# Altium PCB MicroPlayerPCB.PcbDoc
Units mm, origin at the board's own origin, x right, y up, seen from the top; angles counter-clockwise.
Board outline 30 x 30 mm, 4 copper layers (Top Layer, Ground, Power, Bottom Layer), stack 1.282 mm thick; 84 components, 68 nets, 328 pads, 105 vias.
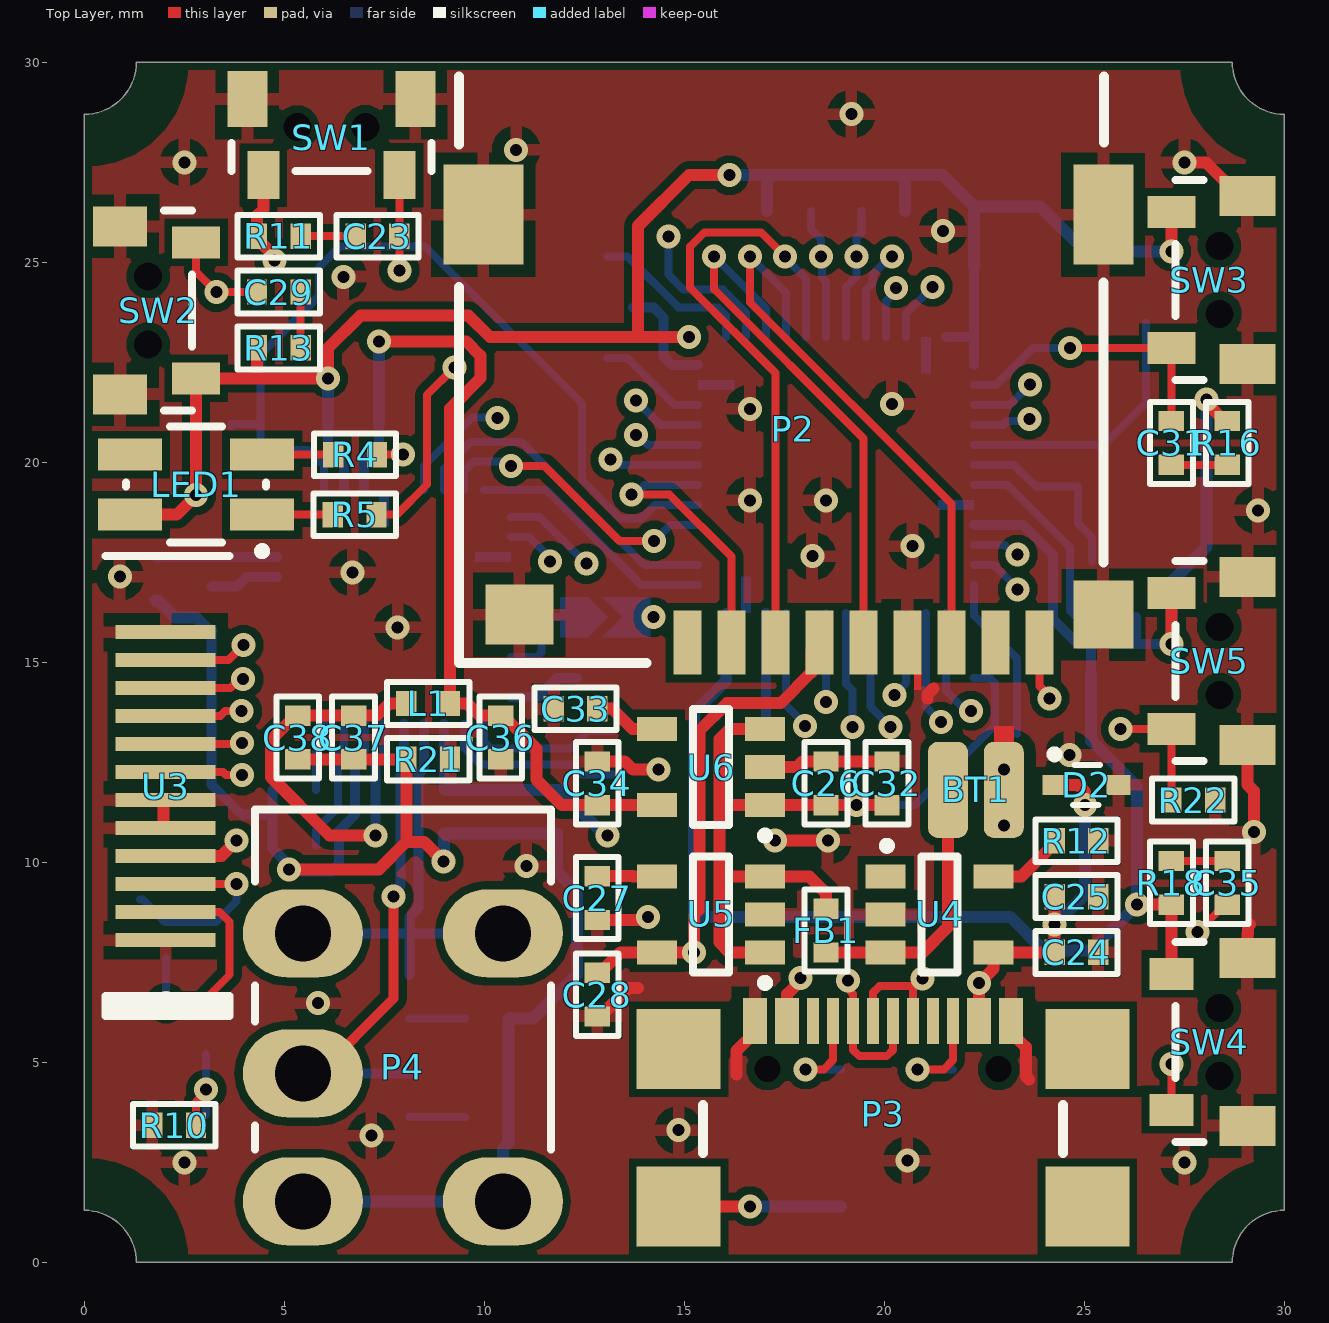
[diagram p0: Top Layer view]
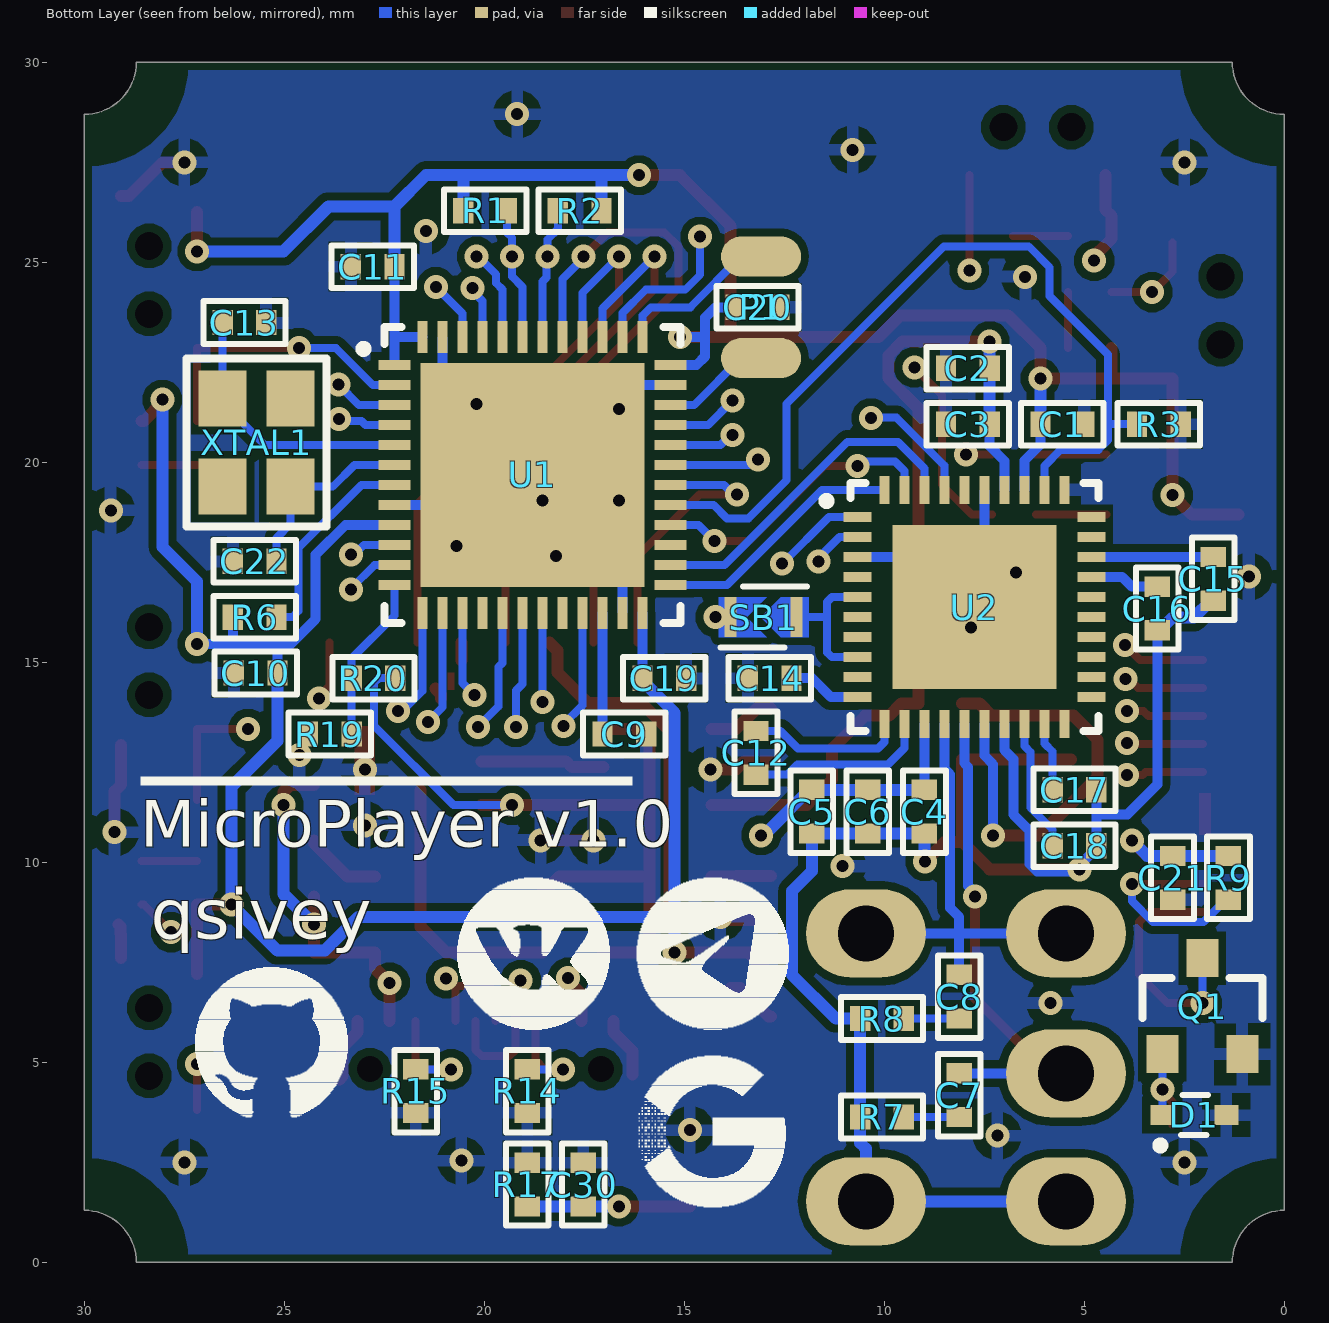
[diagram p1: Bottom Layer view, seen from below]
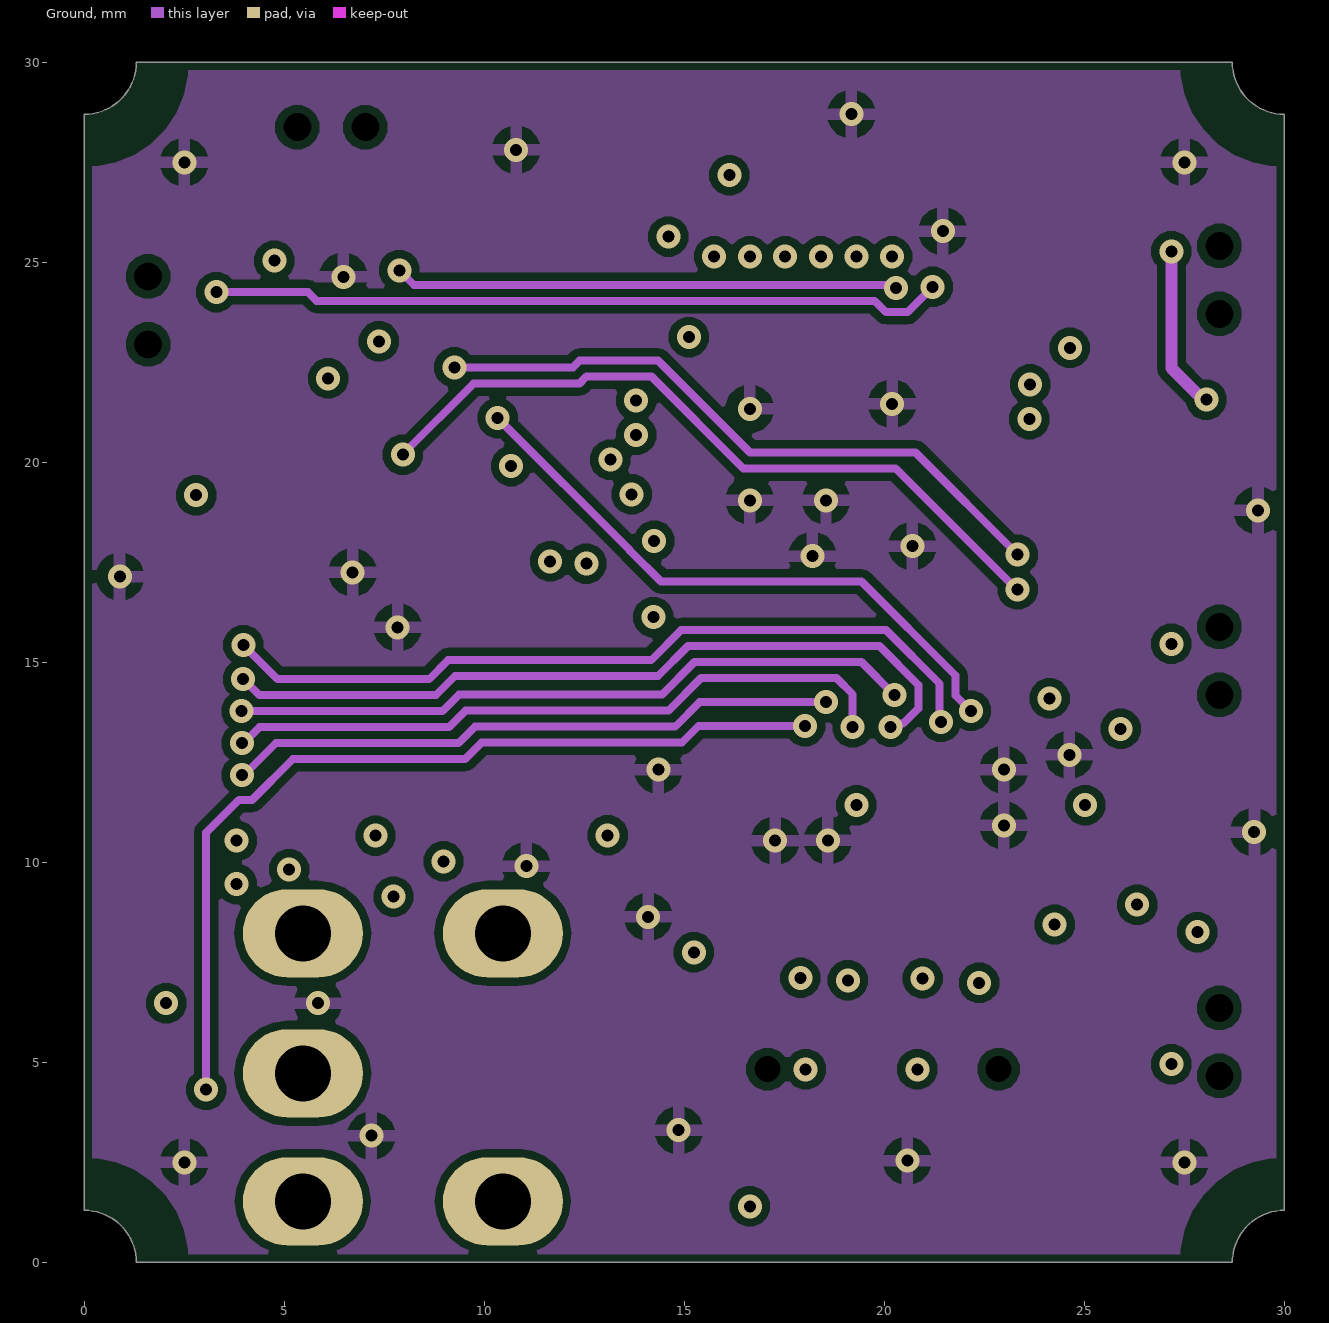
[diagram p2: Ground]
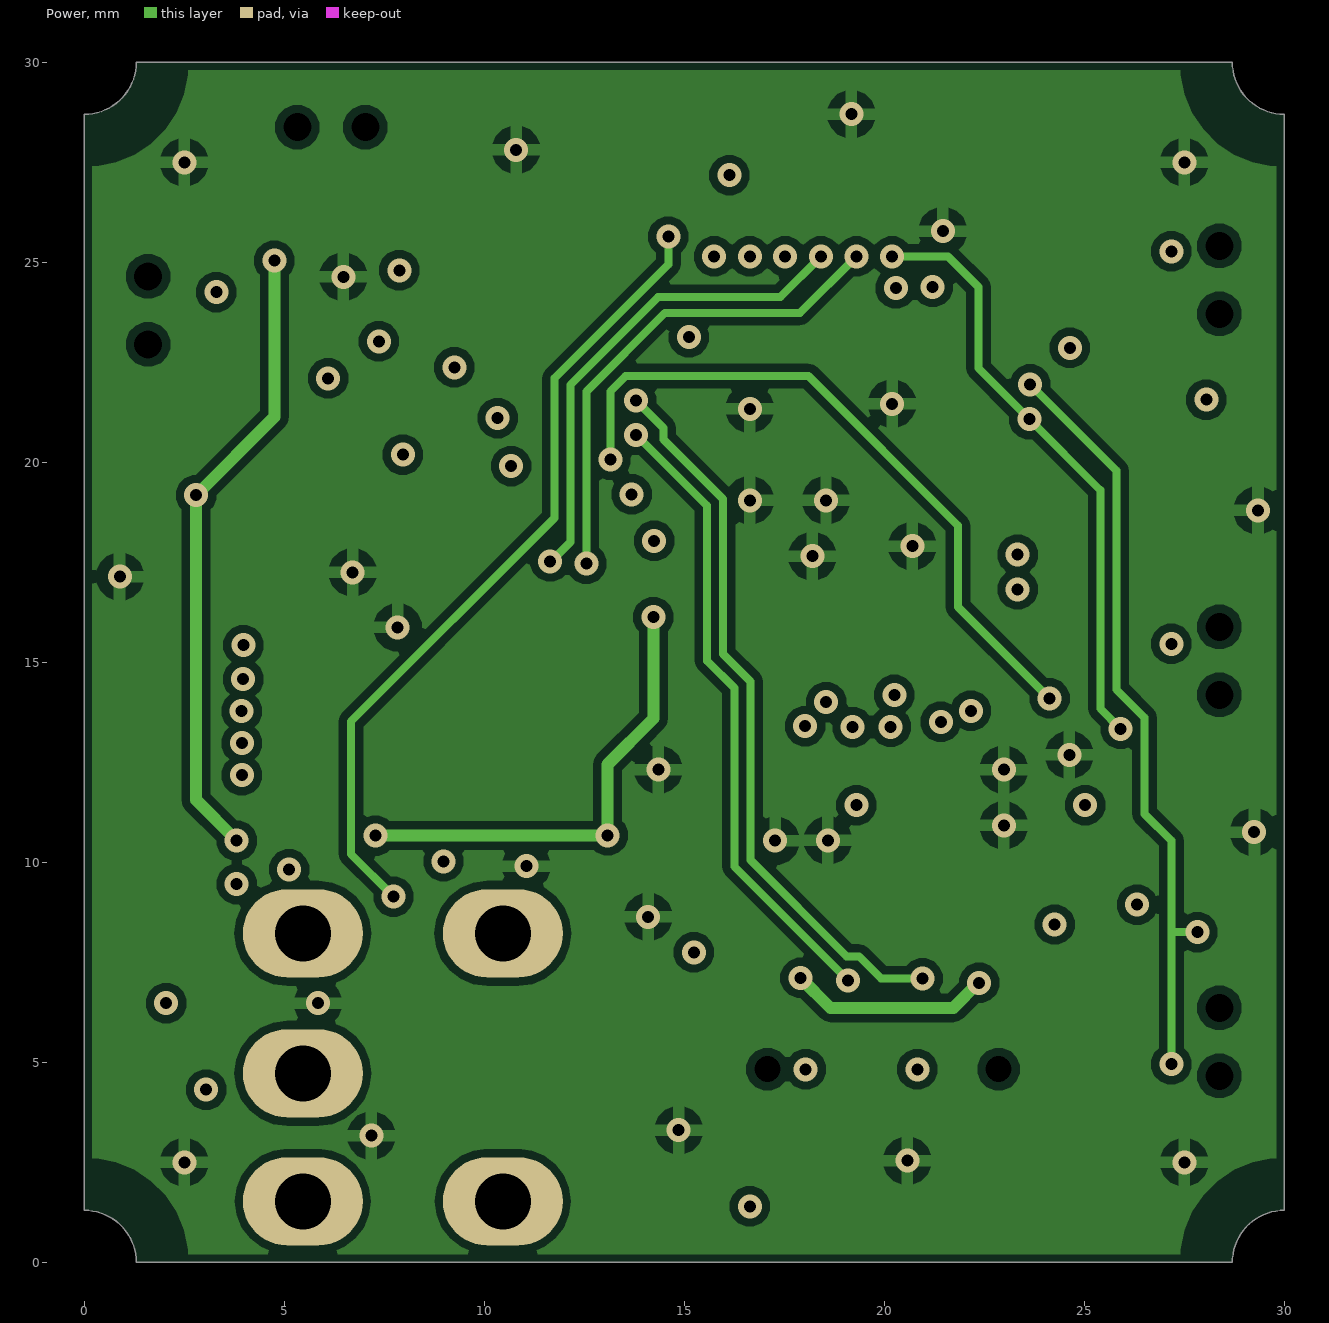
[diagram p3: Power]
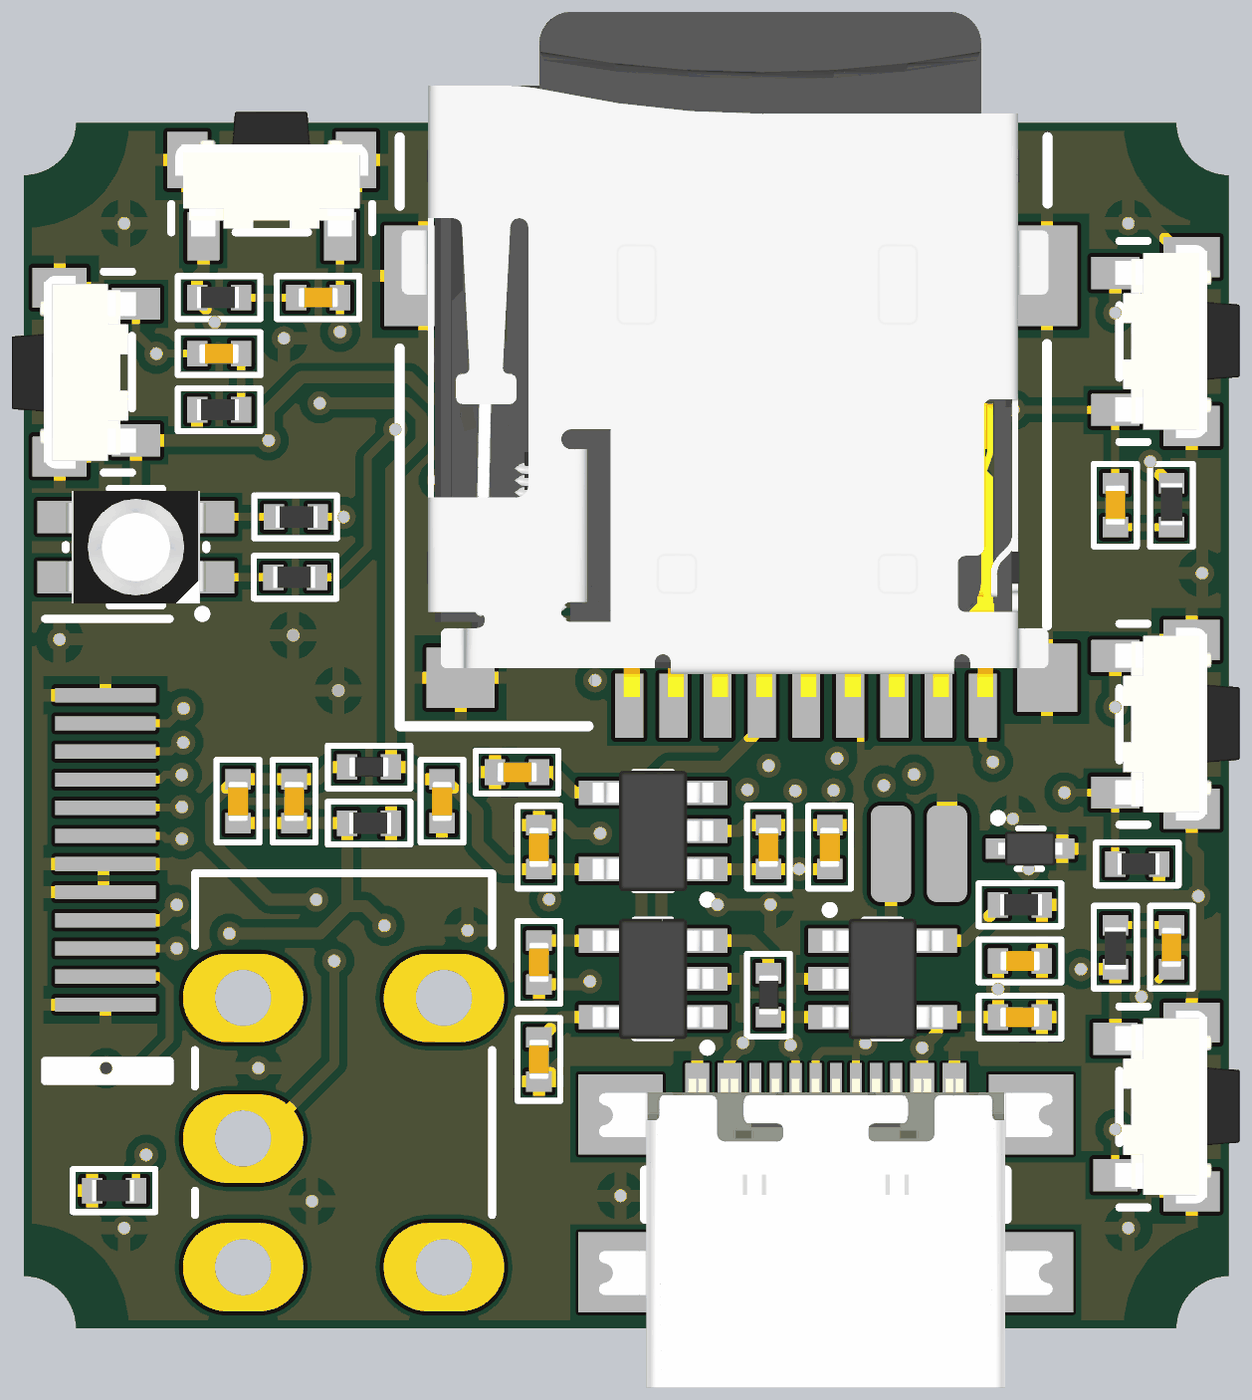
[diagram p4: 3D render of the assembled board from above, using the file's embedded part models]
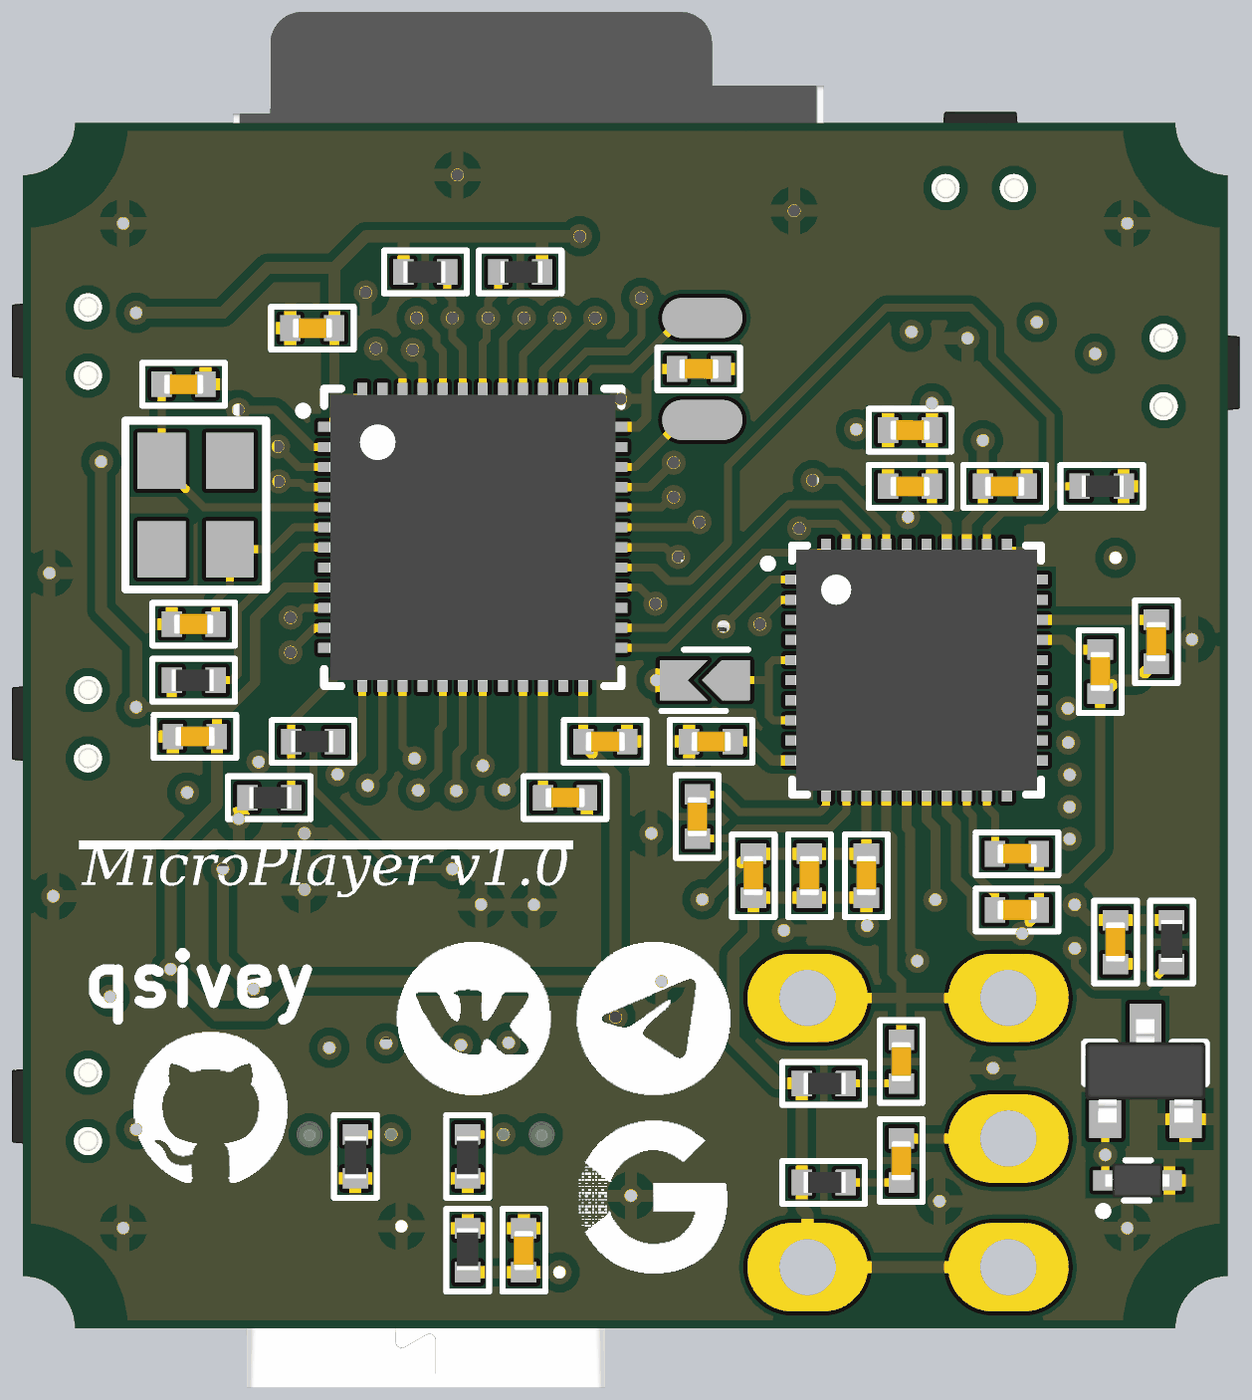
[diagram p5: 3D render of the assembled board from below, using the file's embedded part models]

## Layer stack, top to bottom
Top Solder: solder mask 0.01, Solder Resist, Dk 3.5
Top Layer: signal copper 0.035
Dielectric 2: prepreg 0.0711, PP-006, Dk 4.1
Ground: signal copper 0.035
Dielectric 1: dielectric 1, FR-4, Dk 4.8
Power: signal copper 0.035
Dielectric 3: prepreg 0.0711, PP-006, Dk 4.1
Bottom Layer: signal copper 0.035
Bottom Solder: solder mask 0.01, Solder Resist, Dk 3.5

## Board outline
0,1.3 0,28.7 ccw(c0,30) 1.3,30 28.7,30 ccw(c30,30) 30,28.7 30,1.3 ccw(c30,0) 28.7,0 1.3,0 ccw(c0,0)

## Design rules (kind name [scope] priority, off if disabled: settings)
AssemblyTestPointUsage [All] p1 off:
AssemblyTestpoint [All] p1 off: testpointundercomponent=TRUE minsize=1.016 maxsize=2.54 preferedsize=1.524 minholesize=0 maxholesize=1.016 preferedholesize=0.813 testpointgrid=0.025 usegrid=TRUE gridtolerance=0 allowsidetop=TRUE allowsidebottom=TRUE
BoardOutlineClearance [All] p1: gap=0.2 ignorepadtopadclearanceinfootprint=FALSE
Clearance [All] p1: gap=0.2 ignorepadtopadclearanceinfootprint=FALSE
ComponentClearance [All] p1 off: gap=0 collisioncheckmode=3 verticalgap=0 showdistances=FALSE
DiffPairsRouting [All] p1 off: maxlimit=0.254 minlimit=0.254 mostfreqgap=0.254 toplayer_minwidth=0.381 toplayer_maxwidth=0.381 toplayer_prefwidth=0.381 midlayer1_minwidth=0.381 midlayer1_maxwidth=0.381 midlayer1_prefwidth=0.381 midlayer2_minwidth=0.381 midlayer2_maxwidth=0.381 midlayer2_prefwidth=0.381 bottomlayer_minwidth=0.381 bottomlayer_maxwidth=0.381 bottomlayer_prefwidth=0.381 maxuncoupledlength=12.7
FabricationTestPointUsage [All] p1 off: valid=0 allowmultiple=FALSE
FabricationTestpoint [All] p1 off: side=3 testpointundercomponent=TRUE minsize=1.016 maxsize=2.54 preferedsize=1.524 minholesize=0 maxholesize=1.016 preferedholesize=0.813 testpointgrid=0.025 allowsidetop=TRUE allowsidebottom=TRUE usegrid=TRUE gridtolerance=0
FanoutControl Fanout_BGA [IsBGA] p1 off: bgadir=Out bgaviamode=Centered fanoutstyle=Auto fanoutdirection=Alternating viagrid=0.025 // Fanout_BGA (Default Rule)
Height [All] p1: minheight=0 maxheight=100 prefheight=0.5
HoleSize [All] p1: absolutevalues=TRUE maxlimit=100 minlimit=0.3 maxpercent=80.000 minpercent=20.000
HoleToHoleClearance [All] p1: gap=0.2 allowstackedmicrovias=TRUE
MinimumAnnularRing [All] p1: minimumring=0.1
MinimumSolderMaskSliver [All] p1: minsoldermaskwidth=0
PlaneClearance [All] p1: clearance=0.3
PlaneConnect [All] p1: planeconnectstyle=Relief reliefexpansion=0.5 reliefentries=4 reliefconductorwidth=0.3 reliefairgap=0.3
PolygonConnect [All] p1: connectstyle=Relief reliefconductorwidth=0.3 reliefentries=4 polygonreliefangle="90 Angle" airgapwidth=0.3
RoutingCorners [All] p1: cornerstyle=45-Degree minsetback=0.635 maxsetback=0.635
RoutingVias [All] p1: holewidth=0.4 width=0.8 viastyle="Through Hole" minholewidth=0.3 minwidth=0.6 maxholewidth=0.5 maxwidth=1
SMDEntry [All] p1: side=TRUE corner=TRUE anyangle=FALSE
SMDNeckDown [All] p1: percent=100.000
SMDToCorner [All] p1: distance=39370
SilkToSilkClearance [All] p1: silktosilkclearance=0.2
SilkToSolderMaskClearance [IsPad] p1: minsilkscreentomaskgap=0.03 clearancetoexposedcopper=FALSE
SolderMaskExpansion [All] p1: expansion=0.102 istentingtop=FALSE
Width [All] p1: maxlimit=0.3 minlimit=0.2 preferedwidth=0.25
10 further rules are at their usual default settings.

## Components (designator, comment, footprint, x,y, rotation, side; value= is the part's Value field where it differs from the comment)
BT1 "3.7V" _2-PAD-SM#1 20.828,12.065 r0 top
C1 "100nF" C0402 5.004,20.955 r0 bottom
C2 "100nF" C0402 8.458,22.352 r180 bottom
C3 "1uF" C0402 8.458,20.955 r180 bottom
C4 "2.2uF" C0402 8.997,10.719 r90 bottom
C5 "100nF" C0402 11.811,10.719 r90 bottom
C6 "10nF" C0402 10.414,10.719 r90 bottom
C7 "22nF" C0402 8.128,4.724 r270 bottom
C8 "22nF" C0402 8.128,7.188 r270 bottom
C9 "2.2uF" C0402 17.046,13.208 r180 bottom
C10 "100nF" C0402 26.262,14.732 r180 bottom
C11 "100nF" C0402 23.338,24.892 r180 bottom
C12 "1uF" C0402 13.208,13.284 r270 bottom
C13 "12pF" C0402 26.543,23.495 r180 bottom
C14 "1uF" C0402 13.411,14.605 r180 bottom
C15 "150pF" C0402 1.778,16.541 r90 bottom
C16 "150pF" C0402 3.175,15.799 r90 bottom
C17 "1uF" C0402 5.791,11.811 r180 bottom
C18 "10uF" C0402 5.791,10.414 r180 bottom
C19 "100nF" C0402 16.046,14.605 r180 bottom
C20 "100nF" C0402 13.716,23.876 r180 bottom
C21 "100nF" C0402 2.794,9.068 r90 bottom
C22 "12pF" C0402 25.197,17.526 r0 bottom
C23 "10nF" C0402 6.782,25.654 r0 top
C24 "100nF" C0402 25.349,7.747 r180 top
C25 "1uF" C0402 24.257,9.144 r0 top
C26 "1uF" C0402 18.542,12.522 r270 top
C27 "10nF" C0402 12.827,8.56 r90 top
C28 "1uF" C0402 12.827,6.147 r90 top
C29 "10nF" C0402 5.41,24.257 r180 top
C30 "100nF" C0402 17.526,2.489 r270 bottom
C31 "10nF" C0402 27.178,19.939 r90 top
C32 "100nF" C0402 20.066,12.522 r270 top
C33 "10nF" C0402 11.735,13.843 r0 top
C34 "1uF" C0402 12.827,12.522 r270 top
C35 "10nF" C0402 28.575,10.033 r270 top
C36 "100nF" C0402 10.414,13.665 r270 top
C37 "1uF" C0402 6.731,13.665 r270 top
C38 "100nF" C0402 5.334,13.665 r270 top
D1 "PESD5V0S1UB" SOD-523 1.448,3.683 r0 bottom
D2 "PESD5V0S1UB" SOD-523 25.857,11.938 r180 top
FB1 "EPZ1005E221-1R2T" L0402 18.542,7.747 r90 top value=100uH
L1 "10uH" L0402 9.144,13.97 r180 top
LED1 "3528" LED-3528 1.143,18.693 r0 top
P1 "P2" _2-PAD-SM#2 16.09,25.245 r180 bottom
P2 "microSD Card Holder" MICRO_SD_CARD_SLOT 15.076,15.494 r180 top
P3 "USB4110-GF-A" USB-TYPE-C 16.769,6.027 r0 top
P4 "ST-033" ST-033 10.461,8.224 r270 top
Q1 "2N7002" SOT-23-3-312 3.048,5.207 r90 bottom
R1 "2.2K" R0402 20.511,26.288 r180 bottom
R2 "2.2K" R0402 17.081,26.29 r0 bottom
R3 "10K" R0402 2.603,20.956 r0 bottom
R4 "1K" R0402 7.303,20.194 r180 top
R5 "1K" R0402 6.223,18.692 r0 top
R6 "10K" R0402 26.277,16.128 r180 bottom
R7 "51" R0402 9.525,3.633 r0 bottom
R8 "51" R0402 9.525,6.096 r0 bottom
R9 "150" R0402 1.398,10.148 r270 bottom
R10 "100K" R0402 1.714,3.428 r0 top
R11 "100K" R0402 4.33,25.653 r0 top
R12 "10K" R0402 25.337,10.542 r180 top
R13 "100K" R0402 4.33,22.859 r0 top
R14 "10K" R0402 18.922,3.746 r90 bottom
R15 "10K" R0402 21.716,3.746 r90 bottom
R16 "100K" R0402 28.574,21.019 r270 top
R17 "1M" R0402 18.924,2.477 r270 bottom
R18 "100K" R0402 27.179,8.953 r90 top
R19 "100K" R0402 23.329,13.209 r0 bottom
R20 "100K" R0402 23.305,14.604 r180 bottom
R21 "0" R0402 9.132,12.574 r180 top
R22 "10K" R0402 28.258,11.558 r180 top
SB1 "Open" SOLDBR 13.843,16.129 r180 bottom
SW1 "" BUT-SMD-4X3.5X2MM#1 4.474,27.178 r0 top
SW2 "" BUT-SMD-4X3.5X2MM#2 2.794,22.098 r90 top
SW3 "" BUT-SMD-4X3.5X2MM#1 27.178,26.26 r270 top
SW4 "" BUT-SMD-4X3.5X2MM#3 27.178,7.21 r270 top
SW5 "" BUT-SMD-4X3.5X2MM#1 27.178,16.735 r270 top
U1 "STM32F412CGU6" UFQFPN48 22.246,22.435 r180 bottom
U2 "CS43L22" QFN40 7.747,16.383 r180 bottom
U3 "ST7789" 1.3INCH_LCD_WELDED 2.032,8.057 r90 top
U4 "STC4054" SOT-23-5 20.033,9.647 r0 top
U5 "LD3985M33R" SOT-23-5 17.018,7.747 r180 top
U6 "LD3985M25R" SOT-23-5 17.018,11.43 r180 top
XTAL1 "16 MHz" 7U 24.343,22.19 r270 bottom

## Footprints (in the part's own frame and the unit in brackets; to place one, negate y for a bottom-side part, rotate by r counter-clockwise, add the part's x,y. Pads: shape width x height; smd on the part's side, far side on the other; paste and mask are expansions set on the pad)
1.3INCH_LCD_WELDED [mm]
  rect 0.35x2.5 smd: 1(0,0) 2(0.7,0) 3(1.4,0) 4(2.1,0) 5(2.8,0) 6(3.5,0) 7(4.2,0) 8(4.9,0) 9(5.6,0) 10(6.3,0) 11(7,0) 12(7.7,0)
  silkscreen extent -1.9,-1.6 9.6,1.5
7U [mm] "7U Series SMD Crystal Units"
  rect 1.4x1.2 smd: 0(0.6,-0.5) 0(2.8,-2.2) 1(0.6,-2.2) 2(2.8,-0.5)
  silkscreen extent -0.4,-3.1 3.8,0.4
_2-PAD-SM#1 [mm]
  rrect50% 1x2.4 smd: 1(0.762,-0.254) 2(2.159,-0.254)
_2-PAD-SM#2 [mm]
  oval 2x1 smd: 1(3.009,-0.099) 2(3.009,-2.639)
BUT-SMD-4X3.5X2MM#1 [mm]
  rect 1x1.4 smd: 0(-0.4,1.9) 0(3.8,1.9)
  rect 0.8x1.2 smd: 1(0,0) 2(3.4,0)
  round 0 hole 0.7 unplated: ""(0.85,1.2) ""(2.55,1.2)
  silkscreen extent -0.8,0.1 4.2,0.8, body extent -0.7,0 4.1,3.09, height 1.9
BUT-SMD-4X3.5X2MM#2 [mm]
  rect 1x1.35 smd: 0(-0.4,1.9) 0(3.8,1.9)
  rect 0.8x1.2 smd: 1(0,0) 2(3.4,0)
  round 0 hole 0.7 unplated: ""(0.85,1.2) ""(2.55,1.2)
  silkscreen extent -0.8,0.1 4.2,0.8, body extent -0.7,0 4.1,3.09, height 1.9
BUT-SMD-4X3.5X2MM#3 [mm]
  rect 1x1.4 smd: 0(-0.4,1.9) 0(3.8,1.9)
  rect 0.8x1.1 smd: 1(0,0) 2(3.4,0)
  round 0 hole 0.7 unplated: ""(0.85,1.2) ""(2.55,1.2)
  silkscreen extent -0.8,0.1 4.2,0.8, body extent -0.7,0 4.1,3.09, height 1.9
C0402 [mil]
  rect 20x25 smd: 1(0,0) 2(43,0)
  silkscreen extent -19,-21 62,21, body extent 2,-10 41,10, height 14
L0402 [mil]
  rect 20x25 smd: 1(0,0) 2(43,0)
  silkscreen extent -19,-21 62,21, body extent 2,-10 41,10, height 14
LED-3528 [mm]
  rect 1.6x0.8 smd: 1(0,0) 2(3.3,1.5) 3(3.3,0) 4(0,1.5)
  silkscreen extent -0.1,-1.01 3.4,2.2, body extent -0.1,-0.65 3.4,2.15, height 1.9
MICRO_SD_CARD_SLOT [mm]
  rect 1.5x1.7 smd: 0(-10.4,-0.7)
  rect 1.5x2.5 smd: 0(-10.4,-10.7)
  rect 1.7x1.5 smd: 0(4.2,-0.7)
  rect 2x2.5 smd: 0(5.1,-10.7)
  rect 0.7x1.6 smd: 1(0,0) 2(-1.1,0) 3(-2.2,0) 4(-3.3,0) 5(-4.4,0) 6(-5.5,0) 7(-6.6,0) 8(-7.7,0) 9(-8.8,0)
  silkscreen extent -10.41,-14.15 5.72,0.51, body extent -10.44,-17.27 5.66,-0.22, height 1.85
QFN40 [mm]
  rect 4.1x4.1 smd: 0(0,0)
  rect 0.7x0.25 smd: 1(-2.925,2.25) 2(-2.925,1.75) 3(-2.925,1.25) 4(-2.925,0.75) 5(-2.925,0.25) 6(-2.925,-0.25) 7(-2.925,-0.75) 8(-2.925,-1.25) 9(-2.925,-1.75) 10(-2.925,-2.25) 21(2.925,-2.25) 22(2.925,-1.75) 23(2.925,-1.25) 24(2.925,-0.75) 25(2.925,-0.25) 26(2.925,0.25) 27(2.925,0.75) 28(2.925,1.25) 29(2.925,1.75) 30(2.925,2.25)
  rect 0.25x0.7 smd: 11(-2.25,-2.925) 12(-1.75,-2.925) 13(-1.25,-2.925) 14(-0.75,-2.925) 15(-0.25,-2.925) 16(0.25,-2.925) 17(0.75,-2.925) 18(1.25,-2.925) 19(1.75,-2.925) 20(2.25,-2.925) 31(2.25,2.925) 32(1.75,2.925) 33(1.25,2.925) 34(0.75,2.925) 35(0.25,2.925) 36(-0.25,2.925) 37(-0.75,2.925) 38(-1.25,2.925) 39(-1.75,2.925) 40(-2.25,2.925)
  silkscreen extent -3.8,-3.1 3.1,3.1, body extent -3.01,-3.01 3.01,3.01, height 1
R0402 [mil]
  rect 20x25 smd: 1(-0.47,0.04) 2(42.53,0.04)
  silkscreen extent -19,-21 62,21, body extent 0,-10 40,10, height 16
SOD-523 [mm] "SSMini2, SC-79"
  rect 0.6x0.5 smd: 1(0,0) 2(1.6,0)
  silkscreen extent 0.47,-0.5 1.75,0.86, body extent 0,-0.43 1.6,0.43, height 0.6
SOLDBR [mm]
  rect 0.3x1 smd: 1(0,0) 2(1.651,0)
  Top Layer region: -0.3,0.5 0.9,0.5 0.4,0 0.9,-0.5 -0.3,-0.5
  Top Layer region: 1.951,0.5 1.251,0.5 0.751,0 1.251,-0.5 1.951,-0.5
  silkscreen extent -0.25,-0.76 1.91,0.76
SOT-23-3-312 [mm]
  rect 0.95x0.8 smd: 1(0,0) 2(0,-2) 3(2.4,-1)
  silkscreen extent 0.9,-2.5 1.9,0.5, body extent -0.1,-2.5 2.5,0.5, height 1.15
SOT-23-5 [mm]
  rect 1x0.6 smd: 1(0,0) 2(0,-0.95) 3(0,-1.9) 4(2.7,-1.9) 5(2.7,0)
  silkscreen extent -0.07,-2.4 1.8,0.87, body extent -0.15,-2.45 2.85,0.55, height 1.2
ST-033 [mm]
  oval 2.2x3 hole 1.4: 1(0,0) 2(0,-5) 3(6.7,0) 4(3.5,-5) 6(6.7,-5)
  silkscreen extent -3.1,-6.2 5.4,1.2
UFQFPN48 [mm]
  rect 5.6x5.6 smd: 0(3.45,-2.75)
  rect 0.8x0.25 smd: 1(0,0) 2(0,-0.5) 3(0,-1) 4(0,-1.5) 5(0,-2) 6(0,-2.5) 7(0,-3) 8(0,-3.5) 9(0,-4) 10(0,-4.5) 11(0,-5) 12(0,-5.5) 25(6.9,-5.5) 26(6.9,-5) 27(6.9,-4.5) 28(6.9,-4) 29(6.9,-3.5) 30(6.9,-3) 31(6.9,-2.5) 32(6.9,-2) 33(6.9,-1.5) 34(6.9,-1) 35(6.9,-0.5) 36(6.9,0)
  rect 0.25x0.8 smd: 13(0.7,-6.2) 14(1.2,-6.2) 15(1.7,-6.2) 16(2.2,-6.2) 17(2.7,-6.2) 18(3.2,-6.2) 19(3.7,-6.2) 20(4.2,-6.2) 21(4.7,-6.2) 22(5.2,-6.2) 23(5.7,-6.2) 24(6.2,-6.2) 37(6.2,0.7) 38(5.7,0.7) 39(5.2,0.7) 40(4.7,0.7) 41(4.2,0.7) 42(3.7,0.7) 43(3.2,0.7) 44(2.7,0.7) 45(2.2,0.7) 46(1.7,0.7) 47(1.2,0.7) 48(0.7,0.7)
  silkscreen extent -0.87,-6.45 7.15,0.95, body extent -0.11,-6.31 7.01,0.81, height 0.6
USB-TYPE-C [mm]
  rect 2.1x2 smd mask+0.07: 0(-1.91,-4.63) 0(-1.91,-0.7) 0(8.31,-4.63) 0(8.31,-0.7)
  rect 0.6x1.15 smd mask+0.07: 1(0,0) 2(0.8,0) 11(5.6,0) 12(6.4,0)
  rect 0.3x1.15 smd mask+0.07: 3(1.45,0) 4(1.95,0) 5(2.45,0) 6(2.95,0) 7(3.45,0) 8(3.95,0) 9(4.45,0) 10(4.95,0)
  round 0 hole 0.65 unplated: ""(0.31,-1.2) ""(6.09,-1.2)
  silkscreen extent -1.3,-3.3 7.7,-2.1, body extent -2.45,-7.5 8.85,0.2, height 3.26

## Part data
BT1: library part Battery, Link=https://www.chipdip.ru/product/robiton-lp303030, Name=LP303030
C1 C2 C3 C4 C5 C6 C7 C8 C9 C10 C11 C12 C14 C15 C16 C19 C20 C21 C23 C24 C25 C26 C27 C28 C29 C30 C31 C32 C33 C34 C35: library part Cap, Case=DNP, Part Number=N/A, Tolerance=5%, Voltage=250V
  C15 C16: Note=C0G
C13 C17 C18 C22 C36 C37 C38: library part Cap, Case=0603, Tolerance=5%, Voltage=250V
D1 D2: library part Suppressor, Case=SOD-523, Link=https://www.chipdip.ru/product/pesd5v0s1ub, Name=PESD5V0S1UB
FB1: library part "Ferrite Bead", Case=0402, Name=EPZ1005E221-1R2T
L1: library part Inductor, Case=0805, Part Number=LQM21FN100N00K, Tolerance=30%, Link=https://www.chipdip.ru/product/lqm21fn100n
LED1: library part LED-RGB, Case=3528, Name=3528
P1: Case=DNP, Part Number=N/A, Name=DS1021
P2: library part MicroSD, Name="microSD Card Holder"
P3: library part "USB Type C with 0", Case=DNP, Part Number=N/A, Name=USB4110-GF-A
P4: library part "AJack Socket Stereo", Name=ST-033
Q1: library part MOSFET-N, Case=SOT-23-5, Link=https://www.chipdip.ru/product/2n7002-umw, Name=2N7002
R1 R2 R3 R6 R7 R8 R9 R10 R11 R12 R13 R14 R15 R16 R17 R18 R19 R20 R22: library part Res, Power=0.125W, Tolerance=5%
R4 R5 R21: library part Res, Case=0603, Power=0.125W, Tolerance=5%
SB1: library part "Soldier Bridge"
SW1 SW2 SW3 SW4 SW5: library part Button
U1: library part STM32F412Cxxx, Case=DNP, Part Number=N/A, Name=STM32F412CGU6
U2: "Low Power, Stereo DAC w/Headphone & Speaker Amps", Case=DNP, Part Number=N/A, Name=CS43L22
U3: library part "1.3inch TFT LCD 12-pin", "135x240 Display", Part Number=N/A, Name=ST7789
U4: "800mA Standalone linear Li-Ion Battery charger with thermal regulation", Case=SOT-23-5, Part Number=N/A, Name=STC4054
U5 U6: library part LD3985, "Ultra low drop and low noise BiCMOS voltage regulators, 150 mA", Case=SOT-23-5
  U5: Link=https://www.chipdip.ru/product/ld3985m33r, Name=LD3985M33R
  U6: Link=https://www.chipdip.ru/product/ld3985m25r, Name=LD3985M25R
XTAL1: library part Crystal, Case=DNP, Part Number=N/A, Tolerance=0.001%

## Via types
v1: diameter 0.6, hole 0.3, Top Layer to Bottom Layer, tented both sides, 105 vias

## Nets (pads, with @x,y where several pads share a name; then routed paths per layer and width w, separated by ;. In a path a pad name is that pad's centre, name@x,y a point inside that pad or via, vN(x,y) a via of type N, cw(c..) or ccw(c..) an arc to the next point about the centre after c; other vN are vias at no path point)
+2.5V: C2.2 C3.2 C34.2 C36.1 L1.1 U2.34 U6.5 | length 22.2
  Top Layer w0.3: v1(7.366,23.022) 9.545,23.022 9.901,22.666 9.901,22.103 9.144,21.346 L1.1 9.576,13.97 9.881,13.665 10.477,13.665 11.303,12.84 11.303,12.065 11.938,11.43 C34.2 U6.5
  Bottom Layer w0.25: U2.34 6.997,20.036 7.366,20.405 C3.2
  Bottom Layer w0.3: C3.2 C2.2 v1(7.366,23.022)
+2.5VA: C4.2 C5.2 C6.2 C37.1 C38.1 L1.2 SB1.1 U2.13 U2.16 | length 28.7
  Top Layer w0.3: v1(7.28,10.668) 6.133,10.668 4.667,12.134 4.667,13.061 5.271,13.665 C38.1 C37.1 7.315,13.665 7.619,13.97 L1.2
  Power w0.3: v1(7.28,10.668) 7.284,10.672 13.077,10.672 v1(13.081,10.676) 13.081,12.446 14.226,13.591 v1(14.226,16.129)
  Bottom Layer w0.25: v1(7.28,10.668) 7.28,12.45 7.497,12.667 U2.16 ; C4.2 U2.13
  Bottom Layer w0.3: C4.2@9.017,11.811 C6.2 C5.2 11.874,11.811 13.009,10.676 v1(13.081,10.676)
+3.3V: C1.2 C10.2 C11.2 C19.1 C20.1 C21.2 C28.2 LED1.1 P2.4 R1.1 R2.1 R6.1 R9.1 R11.1 R13.1 R16.1 R18.1 SW1.1 SW2.1 SW3.1 SW4.1 SW5.1 U1.1 U1.9 U1.24 U1.36 U1.48 U2.33 U3.4 U5.5 | length 136.1
  Top Layer w0.3: LED1.1 2.31,18.693 v1(2.794,19.177) SW2.1 4.318,22.098 ; U3.4 3.426,10.157 v1(3.81,10.541) ; R13.1 4.318,22.098 ; SW1.1 4.474,26.318 4.318,26.162 R11.1 4.318,25.59 4.643,25.266 4.643,25.232 4.753,25.122 v1(4.753,25.04) ; C28.2 12.89,7.239 13.399,7.747 U5.5 v1(15.24,7.747) 15.24,8.689 15.375,8.824 15.375,13.288 16.067,13.98 17.407,13.98 18.176,14.749 18.176,15.294 P2.4 ; v1(15.113,23.13) 13.843,23.13 ; v1(16.129,27.178) 15.113,27.178 13.843,25.908 13.843,23.13 ; v1(26.32,8.941) R18.1 SW4.1 ; v1(27.178,15.462) SW5.1 ; v1(27.178,25.273) SW3.1 ; v1(28.049,21.568) 28.049,21.494 28.511,21.031 R16.1 ; 4.318,22.098 v1(6.096,22.098) 6.096,22.86 6.908,23.672 9.602,23.672 10.144,23.13 13.843,23.13
  Ground w0.3: v1(27.178,25.273) 27.178,22.352 27.816,21.714 27.822,21.714 27.967,21.568 v1(28.049,21.568)
  Power w0.3: v1(3.81,10.541) 2.794,11.557 v1(2.794,19.177) 4.753,21.136 v1(4.753,25.04)
  Bottom Layer w0.25: C1.2 6.096,20.447 6.497,20.046 U2.33 ; C20.1 14.224,23.876 14.478,23.622 14.478,23.137 ; v1(15.113,23.13) 15.106,23.137 14.478,23.137 ; U1.36 14.694,22.435 14.478,22.651 14.478,23.137 ; C19.1 U1.24 ; U1.48 22.225,23.135 ; U1.9 23.473,18.435 24.218,17.69 24.218,16.077 24.833,15.462 26.289,15.462 ; U1.1 C11.2 ; C10.2 25.17,15.374 ; R6.1 26.289,15.462 ; v1(27.178,15.462) 26.289,15.462
  Bottom Layer w0.3: R9.1 C21.2 3.429,10.16 v1(3.81,10.541) ; C1.2 v1(6.096,22.098) ; v1(15.24,7.747) 15.24,8.636 ; C19.1 16.046,14.541 15.24,13.735 15.24,8.636 ; v1(16.129,27.178) 20.574,27.178 ; R2.1 17.069,27.102 ; R1.1 20.523,27.127 20.574,27.178 ; C11.2 22.246,26.395 ; C10.2 25.17,13.039 26.32,11.888 v1(26.32,8.941) 25.175,7.796 23.988,7.796 23.147,8.636 15.24,8.636 ; v1(27.178,15.462) 27.178,17.018 28.049,17.889 v1(28.049,21.568) ; v1(27.178,25.273) 25.019,25.273 23.897,26.395 22.246,26.395 ; 20.574,27.178 21.463,27.178 22.246,26.395
AGND: C4.1 C5.1 C6.1 C15.1 C16.1 C17.2 C18.2 C37.2 C38.2 P4.3 P4.6 R7.2 R8.2 R21.2 U2.17 | length 42.8
  Top Layer w0.3: v1(5.118,9.824) 7.366,9.824 8.052,10.51 ; C38.2 C37.2 R21.2 8.052,10.51 ; v1@8.944,10.125 v1@8.979,10.161 ; v1(8.979,10.022) 8.492,10.51 8.052,10.51
  Bottom Layer w0.25: C16.1 3.175,11.946 3.927,11.194 4.699,11.194 ; C17.2 4.699,11.194 ; U2.17 6.997,12.804 6.77,12.577 6.77,11.19 6.37,10.79 6.37,9.962 6.18,9.771 5.278,9.771 4.699,10.351 C18.2 4.699,11.194
  Bottom Layer w0.3: C15.1 1.841,16.541 2.259,16.124 2.787,16.124 3.111,15.799 C16.1 ; P4.6 P4.3 10.461,2.841 10.605,2.985 R7.2 R8.2 11.212,6.095 12.311,7.194 12.311,9.279 11.811,9.779 C5.1 C6.1 C4.1 ; v1(8.979,10.022) 8.997,10.039 8.997,10.615 9.014,10.632 C4.1@9.014,10.701
BACK: C31.2 SW3.2 U1.2 | length 7.1
  Top Layer w0.2: v1(24.638,22.86) SW3.2 C31.2
  Bottom Layer w0.2: U1.2 22.788,21.935 23.713,22.86 v1(24.638,22.86)
BAT_LEVEL: R19.1 R20.1 U1.12 | length 4.2
  Bottom Layer w0.2: U1.12 22.246,16.164 23.317,15.093 R19.1
BOOT: R22.2 SW5.2 U1.4 U1.44 | length 21.8
  Top Layer w0.2: v1(25.908,13.335) SW5.2 R22.2
  Power w0.2: v1(20.193,25.146) 21.59,25.146 22.352,24.384 22.352,22.352 v1(23.627,21.077) 25.4,19.304 25.4,13.843 v1(25.908,13.335)
  Bottom Layer w0.2: U1.44 19.546,24.321 19.704,24.479 19.704,24.697 20.153,25.146 v1(20.193,25.146) ; U1.4 22.967,20.935 23.067,21.035 23.585,21.035 v1(23.627,21.077)
DAC_LRCK: U1.25 U2.40 | length 6.3
  Bottom Layer w0.2: U2.40 11.56,19.308 13.933,16.935 U1.25
DAC_MCLK: U1.13 U2.37 | length 20.9
  Ground w0.2: v1(10.332,21.108) 13.647,17.793 13.647,17.786 14.415,17.018 19.431,17.018 21.784,14.665 21.784,14.166 v1(22.163,13.788)
  Bottom Layer w0.2: U2.37 8.497,19.914 9.7,21.117 10.323,21.117 v1(10.332,21.108) ; U1.13 21.546,14.288 21.955,13.879 21.963,13.879 22.055,13.788 v1(22.163,13.788)
DAC_RES: R3.2 U1.29 U2.32 | length 21.9
  Bottom Layer w0.2: R3.2@3.683,20.892 R3.2 4.408,20.955 ; U2.32 5.997,19.91 5.594,20.312 4.651,20.312 4.408,20.555 4.408,20.955 ; U1.29 14.266,18.935 13.93,18.598 13.401,18.598 12.446,19.553 12.446,21.463 8.509,25.4 6.39,25.4 5.867,24.877 5.867,24.155 4.408,22.696 4.408,20.955
DAC_SCL: R2.2 U1.42 U2.2 | length 16.8
  Power w0.2: v1(11.646,17.524) 11.669,17.524 12.153,18.008 12.153,21.5 12.154,21.502 12.154,21.937 14.347,24.13 17.399,24.13 v1(18.415,25.146)
  Bottom Layer w0.2: U2.2 11.122,18.133 11.646,17.609 v1(11.646,17.524) ; R2.2 18.161,25.83 18.415,25.576 v1(18.415,25.146) 18.446,25.115 18.446,24.619 18.546,24.519 U1.42
DAC_SCLK: U1.26 U2.38 | length 8.4
  Bottom Layer w0.2: U2.38 8.997,19.849 9.656,20.508 10.925,20.508 13.998,17.435 U1.26
DAC_SDA: R1.2 U1.43 U2.1 | length 18.1
  Power w0.2: v1(12.553,17.467) 12.553,21.335 12.554,21.336 12.554,21.771 14.513,23.73 17.888,23.73 v1(19.304,25.146)
  Bottom Layer w0.2: U2.1 11.386,18.633 v1(12.553,17.467) ; U1.43 19.046,24.387 19.304,24.645 v1(19.304,25.146) 19.304,25.613 19.431,25.74 R1.2
DAC_SDIN: U1.28 U2.39 | length 7.4
  Top Layer w0.2: v1(10.668,19.908) 11.504,19.908 13.377,18.035 v1(14.247,18.035)
  Bottom Layer w0.2: U2.39 9.497,19.783 9.733,20.019 10.449,20.019 10.56,19.908 v1(10.668,19.908) ; v1(14.247,18.035) 14.647,18.435 U1.28
DGND: BT1.2 C1.1 C2.1 C3.1 C9.2 C10.1 C11.1 C13.2 C14.1 C19.2 C20.2 C21.1 C22.2 C24.1 C25.2 C26.1 C27.1 C28.1 C30.1 C32.1 C33.1 C34.1 C36.2 D1.1 D2.1 P2.0 P2.6 P3.1 P3.12 Q1.2 R3.1 R10.1 R12.1 R14.1 R15.1 R17.1 R19.2 R21.1 R22.1 SW1.0 SW2.0 SW3.0 SW4.0 SW5.0 U1.0 U1.8 U1.23 U1.35 U1.47 U2.0 U2.3 U2.31 U2.35 U3.1 U3.5 U3.6 U3.12 U4.2 U5.2 U6.2 | length 17.6
  Top Layer w0.3: C28.1 12.89,6.147 13.602,6.858 13.843,6.858 ; C27.1 13.94,8.56 14.016,8.636 v1(14.097,8.636) ; C34.1 13.51,12.522 13.713,12.319 v1(14.351,12.319) ; 16.299,4.699 16.299,5.282 16.769,5.752 P3.1 ; U6.2 17.814,12.38 17.956,12.522 C32.1 ; v1(17.272,10.541) 17.276,10.545 18.587,10.545 v1(18.591,10.549) ; P2.6@20.576,15.044 P2.6 ; 21.082,14.097 21.082,14.2 21.226,14.344 ; P3.12 23.169,5.752 23.54,5.381 23.54,4.654 23.622,4.572 ; v1(27.5,27.5) 28.038,27.5 28.878,26.66 SW3.0@29.078,26.66 ; SW4.0@29.078,7.61 29.078,8.21 29.092,8.224 29.092,8.392 29.14,8.439 ; SW5.0@29.078,12.935 29.078,11.943 29.243,11.778 v1(29.243,10.756)
  other v1: 2.5,2.5 27.5,2.5 20.574,2.54 7.176,3.164 14.859,3.302 5.842,6.477 11.049,9.906 22.987,10.922 22.987,12.319 24.625,12.683 7.833,15.874 0.889,17.145 6.708,17.249 18.202,17.654 20.701,17.907 29.337,18.796 16.637,19.05 18.542,19.05 16.637,21.336 20.193,21.463 6.477,24.638 21.463,25.781 2.5,27.5 10.795,27.813 19.177,28.702
LCD_BL: D1.2 Q1.1 R10.2 U1.21 | length 28
  Top Layer w0.2: R10.2 2.794,4.006 3.048,4.26 v1(3.048,4.318)
  Ground w0.2: v1(3.048,4.318) 3.048,10.743 3.862,11.557 4.191,11.557 5.212,12.578 9.519,12.578 9.932,12.992 14.938,12.992 15.35,13.404 v1(18.018,13.404)
  Bottom Layer w0.2: D1.2 v1(3.048,4.318) Q1.1 ; U1.21 17.546,13.922 18.018,13.45 v1(18.018,13.404)
LCD_CS: U1.18 U3.8 | length 21.8
  Top Layer w0.2: U3.8 3.916,12.957 v1(3.937,12.978)
  Ground w0.2: v1(3.937,12.978) 3.983,12.978 4.383,13.378 9.118,13.378 9.531,13.792 14.606,13.792 15.42,14.605 18.805,14.605 19.21,14.201 v1(19.21,13.378)
  Bottom Layer w0.2: U1.18 19.046,14.46 19.21,14.297 v1(19.21,13.378)
LCD_DC: U1.19 U3.7 | length 19.5
  Top Layer w0.2: U3.7 3.466,12.257 3.545,12.178 v1(3.937,12.178)
  Ground w0.2: v1(3.937,12.178) 3.986,12.178 4.786,12.978 9.353,12.978 9.766,13.392 14.772,13.392 15.386,14.005 v1(18.546,14.005)
  Bottom Layer w0.2: v1(18.546,14.005) U1.19
LCD_RES: U1.14 U3.11 | length 24.8
  Top Layer w0.2: U3.11 3.608,15.057 v1(3.979,15.427)
  Ground w0.2: v1(3.979,15.427) 4.828,14.578 8.621,14.578 9.096,15.053 14.171,15.053 14.923,15.805 20.043,15.805 21.384,14.463 21.384,13.539 v1(21.413,13.511)
  Bottom Layer w0.2: U1.14 21.046,13.878 v1(21.413,13.511)
LCD_SCL: U1.15 U3.9 | length 21.3
  Top Layer w0.2: U3.9 3.399,13.657 3.52,13.778 v1(3.934,13.778)
  Ground w0.2: v1(3.934,13.778) 8.952,13.778 9.366,14.192 14.441,14.192 15.254,15.005 19.429,15.005 v1(20.25,14.184)
  Bottom Layer w0.2: v1(20.25,14.184) 20.546,14.48 U1.15
LCD_SDA: U1.17 U3.10 | length 24.6
  Top Layer w0.2: U3.10 3.654,14.357 3.875,14.578 v1(3.971,14.578)
  Ground w0.2: v1(3.971,14.578) 3.983,14.578 4.383,14.178 8.787,14.178 9.261,14.653 14.337,14.653 15.089,15.405 19.877,15.405 20.85,14.432 20.85,13.847 20.468,13.465 20.234,13.465 v1(20.158,13.389)
  Bottom Layer w0.2: U1.17 19.546,14.986 19.65,14.882 19.65,13.897 v1(20.158,13.389)
LED_G: R4.1 U1.11 | length 20.4
  Top Layer w0.2: R4.1@7.322,20.2 R4.1 v1(7.963,20.193)
  Ground w0.2: v1@7.963,20.2 9.735,21.972 12.378,21.972 12.551,22.145 14.177,22.145 16.475,19.847 20.285,19.847 23.309,16.823 v1(23.334,16.823)
  Bottom Layer w0.2: U1.11 22.74,17.435 23.312,16.863 v1@23.312,16.823
LED_R: R5.2 U1.10 | length 22.1
  Top Layer w0.2: R5.2 7.814,18.693 8.563,19.441 8.563,21.684 v1(9.251,22.372)
  Ground w0.2: v1(9.251,22.372) 12.212,22.372 12.385,22.545 14.343,22.545 16.641,20.247 20.777,20.247 v1(23.334,17.69)
  Bottom Layer w0.2: U1.10 23.013,17.935 23.257,17.69 v1(23.334,17.69)
NetBT1_1: BT1.1 FB1.1 U4.3 | length 6.7
  Top Layer w0.3: FB1.1 U4.3 20.955,7.747 21.59,8.382 BT1.1
NetC7_2: C7.2 R7.1 | length 1.4
  Bottom Layer w0.2: C7.2 R7.1
NetC8_2: C8.2 R8.1 | length 1.4
  Bottom Layer w0.2: C8.2 9.158,6.096 ; 9.159,6.095 R8.1
NetC12_1: C12.1 U2.11 | length 3.9
  Bottom Layer w0.2: U2.11 9.997,13.008 10.159,12.846 12.159,12.846 12.597,13.284 C12.1
NetC12_2: C12.2 U2.12 | length 4.6
  Bottom Layer w0.2: U2.12 9.497,12.855 9.906,12.446 12.172,12.446 12.426,12.192 C12.2
NetC14_2: C14.2 U2.10 | length 1.8
  Bottom Layer w0.25: U2.10 11.339,14.133 11.811,14.605 C14.2
NetC15_2: C15.2 U2.28 | length 3
  Bottom Layer w0.25: C15.2 U2.28
NetC16_2: C16.2 U2.27 | length 1.7
  Bottom Layer w0.25: C16.2 3.81,16.891 4.052,17.133 U2.27
NetC17_1: C17.1 U2.19 | length 1.7
  Bottom Layer w0.2: C17.1 5.791,12.765 5.997,12.971 U2.19
NetC18_1: C18.1 U2.18 | length 3.3
  Bottom Layer w0.2: C18.1 5.791,10.812 6.345,11.366 6.345,12.753 6.497,12.905 U2.18
NetC23_1: C23.1 R11.2 | length 1.4
  Top Layer w0.2: R11.2 C23.1
NetC24_2: C24.2 C25.1 D2.2 P3.2 P3.11 U4.4 | length 15.5
  Top Layer w0.3: P3.2 17.569,6.702 17.904,7.037 v1(17.904,7.109) ; P3.11 v1(22.369,6.985) ; v1(22.369,6.985) 22.733,7.347 U4.4 C24.2 v1(24.257,8.445) C25.1 ; D2.2 24.843,11.938 25.019,11.762 v1(25.019,11.43)
  Power w0.3: v1(17.904,7.109) 18.65,6.363 21.73,6.363 v1@22.352,6.985
  Bottom Layer w0.3: v1(24.257,8.445) 25.019,9.207 v1(25.019,11.43)
NetC26_2: C26.2 C32.2 FB1.2 R20.2 U5.1 U5.3 U6.1 U6.3 | length 20.9
  Top Layer w0.3: U5.1 16.129,7.747 15.875,8.001 15.875,9.647 ; U6.3 16.124,13.33 15.875,13.081 15.875,11.43 ; FB1.2 18.542,9.23 18.125,9.647 15.875,9.647 ; C32.2 v1(19.304,11.43) C26.2 U6.1 15.875,11.43 ; 15.875,9.647 15.875,11.43
  Bottom Layer w0.2: v1(19.304,11.43) 20.773,11.43 22.763,13.42 22.763,14.478 22.636,14.605 R20.2
NetC27_2: C27.2 U5.4 | length 1.5
  Top Layer w0.3: C27.2 13.713,9.652 13.718,9.647 U5.4
NetC29_1: C29.1 R13.2 | length 1.4
  Top Layer w0.2: R13.2 C29.1
NetC30_2: C30.2 P3.0@14.859,1.397 R17.2 | length 4.1
  Top Layer w0.3: P3.0@14.859,1.397 v1(16.637,1.397)
  Bottom Layer w0.3: v1(16.637,1.397) C30.2 R17.2
NetC31_1: C31.1 R16.2 | length 1.4
  Top Layer w0.2: C31.1 R16.2
NetC33_2: C33.2 U6.4 | length 1.7
  Top Layer w0.3: C33.2 13.197,13.843 13.71,13.33 U6.4
NetC35_1: C35.1 R18.2 | length 1.4
  Top Layer w0.2: R18.2 C35.1
NetLED1_2: LED1.2 R4.2 | length 1.8
  Top Layer w0.2: LED1.2 R4.2
NetLED1_3: LED1.3 R5.1 | length 1.8
  Top Layer w0.2: LED1.3 R5.1
NetP3_4: P3.4 R14.2 | length 2.6
  Top Layer w0.2: v1(18.034,4.826) 18.49,4.826 18.719,5.055 P3.4
  Bottom Layer w0.2: v1(18.034,4.826) R14.2
NetP3_10: P3.10 R15.2 | length 2.8
  Top Layer w0.2: v1(20.828,4.826) 21.49,4.826 21.719,5.055 P3.10
  Bottom Layer w0.2: v1(20.828,4.826) R15.2
NetQ1_3: Q1.3 U3.2 | length 6
  Top Layer w0.2: U3.2 3.382,8.757 3.634,8.505 3.634,7.19 2.921,6.477 v1(2.048,6.477)
  Bottom Layer w0.2: v1(2.048,6.477) Q1.3
NetR6_2: R6.2 U1.7 | length 5.2
  Bottom Layer w0.2: U1.7 23.074,19.435 24.643,17.866 24.643,16.288 24.802,16.129 R6.2
NetR9_2: R9.2 U3.3 | length 5.1
  Top Layer w0.2: U3.3 v1(3.81,9.457)
  Bottom Layer w0.2: R9.2 1.46,9.068 2.019,8.509 3.289,8.509 3.81,9.03 v1(3.81,9.457)
NetR12_2: R12.2 U4.5 | length 1.9
  Top Layer w0.3: U4.5 23.426,9.647 24.257,10.477 R12.2
NetSB1_2: SB1.2 U2.5 U2.8 | length 3.6
  Bottom Layer w0.2: U2.8 11.313,15.133 11.43,15.25 11.43,16.129 ; U2.5 11.307,16.633 11.43,16.51 11.43,16.129 ; SB1.2 11.43,16.129
NEXT: C35.2 SW4.2 U1.3 | length 22.9
  Top Layer w0.2: SW4.2 v1(27.178,4.953) ; v1(27.828,8.255) 27.828,8.257 28.511,8.941 C35.2
  Power w0.2: v1(23.647,21.946) 25.8,19.793 25.8,14.324 26.508,13.616 26.508,11.211 27.178,10.541 27.178,8.255 ; v1(27.178,4.953) 27.178,8.255 ; v1(27.828,8.255) 27.178,8.255
  Bottom Layer w0.2: U1.3 23.137,21.435 v1(23.647,21.946)
OUT_A: C7.1 P4.4 U1.38 U2.15 | length 36.8
  Top Layer w0.25: P4.4 5.861,4.724 7.729,6.592 v1(7.729,9.144)
  Power w0.2: v1(7.729,9.144) 6.663,10.211 6.663,13.521 11.753,18.611 11.753,21.913 11.754,21.914 11.754,22.103 14.603,24.951 v1(14.603,25.645)
  Bottom Layer w0.2: v1(14.603,25.645) 14.603,24.69 14.978,24.315 15.963,24.315 16.546,23.732 U1.38
  Bottom Layer w0.25: P4.4 C7.1 ; v1(7.729,9.144) 7.729,9.239 7.905,9.414 7.905,12.386 7.997,12.479 U2.15
OUT_B: C8.1 P4.1 P4.2 U2.14 | length 11.4
  Bottom Layer w0.25: P4.2 8.128,8.224 ; C8.1 8.128,8.224 ; U2.14 8.497,12.342 8.354,12.2 8.354,8.862 8.128,8.636 8.128,8.224 ; P4.1 8.128,8.224
RCC_OSC_IN: C13.1 U1.5 XTAL1.1 | length 6.7
  Bottom Layer w0.2: U1.5 25.488,20.435 26.543,21.49 XTAL1.1 C13.1
RCC_OSC_OUT: C22.1 U1.6 XTAL1.2 | length 4.8
  Bottom Layer w0.2: U1.6 23.245,19.935 23.79,19.39 XTAL1.2 24.843,18.464 25.197,18.11 C22.1
SD_CS: P2.2 U1.30 | length 7.1
  Top Layer w0.2: v1(13.681,19.198) 14.623,19.198 16.176,17.646 P2.2
  Bottom Layer w0.2: v1(13.681,19.198) 13.774,19.198 14.01,19.435 U1.30
SD_DET: P2.9 U1.31 | length 21.1
  Top Layer w0.2: P2.9 23.876,14.409 24.13,14.155 v1(24.13,14.097)
  Power w0.2: v1(13.153,20.066) 13.153,21.775 13.534,22.157 18.102,22.157 21.844,18.415 21.844,16.383 v1(24.13,14.097)
  Bottom Layer w0.2: v1(13.153,20.066) 13.261,20.066 13.392,19.935 U1.31
SD_DI: P2.3 U1.41 | length 15.7
  Top Layer w0.2: P2.3 17.276,22.233 15.148,24.361 15.148,25.395 15.499,25.746 16.922,25.746 v1(17.522,25.146)
  Bottom Layer w0.2: v1@17.522,25.11 18.046,24.586 U1.41
SD_DO: P2.7 U1.40 | length 14.1
  Top Layer w0.2: v1(16.637,25.146) 16.637,24.003 21.676,18.964 P2.7
  Bottom Layer w0.2: v1(16.637,25.146) 17.546,24.237 U1.40
SD_SCK: P2.5 U1.39 | length 13.7
  Top Layer w0.2: v1(15.748,25.146) 15.748,24.326 19.476,20.598 P2.5
  Bottom Layer w0.2: v1(15.748,25.146) 17.046,23.848 U1.39
SWCLK: P1.1 U1.37 | length 4.1
  Bottom Layer w0.2: P1.1 13.581,25.146 14.851,23.876 15.837,23.876 16.046,23.667 U1.37
SWDIO: P1.2 U1.34 | length 2.8
  Bottom Layer w0.2: P1.2 13.581,22.606 14.752,21.435 U1.34
USB_DM: P3.5 P3.7 U1.32 | length 21.1
  Top Layer w0.2: v1(19.091,7.05) 19.168,6.973 19.168,6.753 19.219,6.702 P3.5 19.219,5.31 19.377,5.152 20.061,5.152 20.219,5.31 P3.7
  Power w0.2: v1(13.796,20.687) 15.568,18.915 15.568,15.039 16.251,14.356 16.251,9.89 v1(19.091,7.05)
  Bottom Layer w0.2: v1@13.78,20.687 v1(13.796,20.687) 13.842,20.687 14.094,20.435 U1.32
USB_DP: P3.6 P3.8 U1.33 | length 22.9
  Top Layer w0.2: P3.6 19.719,6.744 19.877,6.902 20.652,6.902 ; P3.8 20.719,6.861 v1(20.955,7.097)
  Power w0.2: v1(13.796,21.543) 14.478,20.86 14.478,20.57 15.968,19.081 15.968,15.205 16.651,14.522 16.651,10.056 19.057,7.65 19.37,7.65 19.923,7.097 v1(20.955,7.097)
  Bottom Layer w0.2: v1(13.796,21.543) 14.403,20.935 14.846,20.935 U1.33
VCAP: C9.1 U1.22 | length 3
  Bottom Layer w0.25: C9.1 U1.22
VOL+: C29.2 SW2.2 U1.46 | length 22.4
  Top Layer w0.2: SW2.2 2.794,24.765 v1(3.302,24.257) C29.2
  Ground w0.2: v1(3.302,24.257) 5.588,24.257 5.807,24.038 19.756,24.038 20.042,23.752 20.577,23.752 v1(21.209,24.384)
  Bottom Layer w0.2: U1.46 20.546,23.721 v1(21.209,24.384)
VOL–: C23.2 SW1.2 U1.45 | length 16.3
  Top Layer w0.2: v1(7.874,24.8) SW1.2
  Ground w0.2: v1(7.874,24.8) 8.236,24.438 19.922,24.438 19.931,24.428 20.214,24.428 v1(20.29,24.352)
  Bottom Layer w0.2: U1.45 20.046,24.031 20.29,24.275 v1(20.29,24.352)
pads on no net: LED1.4 P2.1 P2.8 P3. P3.0@14.859,5.327 P3.0@25.079,1.397 P3.0@25.079,5.327 P3.3 P3.9 SW1. SW2. SW3. SW4. SW5. U1.16 U1.20 U1.27 U2.4 U2.6 U2.7 U2.9 U2.20 U2.21 U2.22 U2.23 U2.24 U2.25 U2.26 U2.29 U2.30 U2.36 U4.1 XTAL1.0

## Polygon pours and split planes (outlines as drawn)
DGND on Top Layer "GND_BOT" (solid, remove dead copper, pour order 3): 0,30 0,0 30,0 30,30
DGND on Ground "GND_BOT" (solid, remove dead copper, pour order 2): 0,30 0,0 30,0 30,30
DGND on Power "GND_BOT" (solid, remove dead copper, pour order 1): 0,30 0,0 30,0 30,30
DGND on Bottom Layer "GND_BOT" (solid, remove dead copper, pour order 0): 0,30 0,0 30,0 30,30

## Other copper
Top Layer:
  rectangle net DGND: 20.74,14.308 20.926,14.75
  rectangle net DGND: 22.737,11.684 23.241,13.408
  rectangle net DGND: 1.832,10.682 2.132,11.732
  pour cut-out: 30,30 27.4,30 27.4,29.94 ccw(c29.94,29.94) 29.94,27.4 30,27.4
  pour cut-out: 30,0 30,2.6 29.94,2.6 ccw(c29.94,0.06) 27.4,0.06 27.4,0
  pour cut-out: 0,0 2.6,0 2.6,0.06 ccw(c0.06,0.06) 0.06,2.6 0,2.6
  pour cut-out: 0,30 0,27.4 0.06,27.4 ccw(c0.06,29.94) 2.6,29.94 2.6,30
Ground:
  pour cut-out: 30,0 30,2.6 29.94,2.6 ccw(c29.94,0.06) 27.4,0.06 27.4,0
  pour cut-out: 0,0 2.6,0 2.6,0.06 ccw(c0.06,0.06) 0.06,2.6 0,2.6
  pour cut-out: 0,30 0,27.4 0.06,27.4 ccw(c0.06,29.94) 2.6,29.94 2.6,30
  pour cut-out: 30,30 27.4,30 27.4,29.94 ccw(c29.94,29.94) 29.94,27.4 30,27.4
Power:
  pour cut-out: 0,0 2.6,0 2.6,0.06 ccw(c0.06,0.06) 0.06,2.6 0,2.6
  pour cut-out: 30,0 30,2.6 29.94,2.6 ccw(c29.94,0.06) 27.4,0.06 27.4,0
  pour cut-out: 30,30 27.4,30 27.4,29.94 ccw(c29.94,29.94) 29.94,27.4 30,27.4
  pour cut-out: 0,30 0,27.4 0.06,27.4 ccw(c0.06,29.94) 2.6,29.94 2.6,30
Bottom Layer:
  region net DGND: 7.622,18.398 7.622,19.308 7.372,19.308 7.372,18.398
  rectangle net DGND: 9.762,17.508 10.672,17.758
  region net DGND: 16.421,17.145 16.421,16.235 16.671,16.235 16.671,17.145
  region net DGND: 16.256,22.06 15.346,22.06 15.346,21.81 16.256,21.81
  region net DGND: 21.171,22.225 21.171,23.135 20.921,23.135 20.921,22.225
  rectangle net DGND: 21.336,18.81 22.246,19.06
  pour cut-out: 30,0 30,2.6 29.94,2.6 ccw(c29.94,0.06) 27.4,0.06 27.4,0
  pour cut-out: 0,0 2.6,0 2.6,0.06 ccw(c0.06,0.06) 0.06,2.6 0,2.6
  pour cut-out: 30,30 27.4,30 27.4,29.94 ccw(c29.94,29.94) 29.94,27.4 30,27.4
  pour cut-out: 0,30 0,27.4 0.06,27.4 ccw(c0.06,29.94) 2.6,29.94 2.6,30

## Silkscreen, mask and mechanical layers (free items; w line width, h text height)
Bottom Overlay:
  drawing of 1191 lines, arcs and shapes, not listed
  text "MicroPlayer v1.0" at 28.6,10 h2
  text "qsivey" at 28.336,8.083 h1.25
Board:
  the board outline again, w0.2
Top Draw:
  lines w0.2: 0,2.6 cw(c0,0) 2.6,0 ; 0,27.4 ccw(c0,30) 2.6,30 ; 1.1,11.9 1.8,11.9 ; 27.4,0 cw(c30,0) 30,2.6 ; 27.4,30 ccw(c30,30) 30,27.4
  lines w0.5: -2.5,-2.5 32.5,-2.5 32.5,32.5 -2.5,32.5 -2.5,-2.5